# EAGLE board board3 (EAGLE 7.7.0)
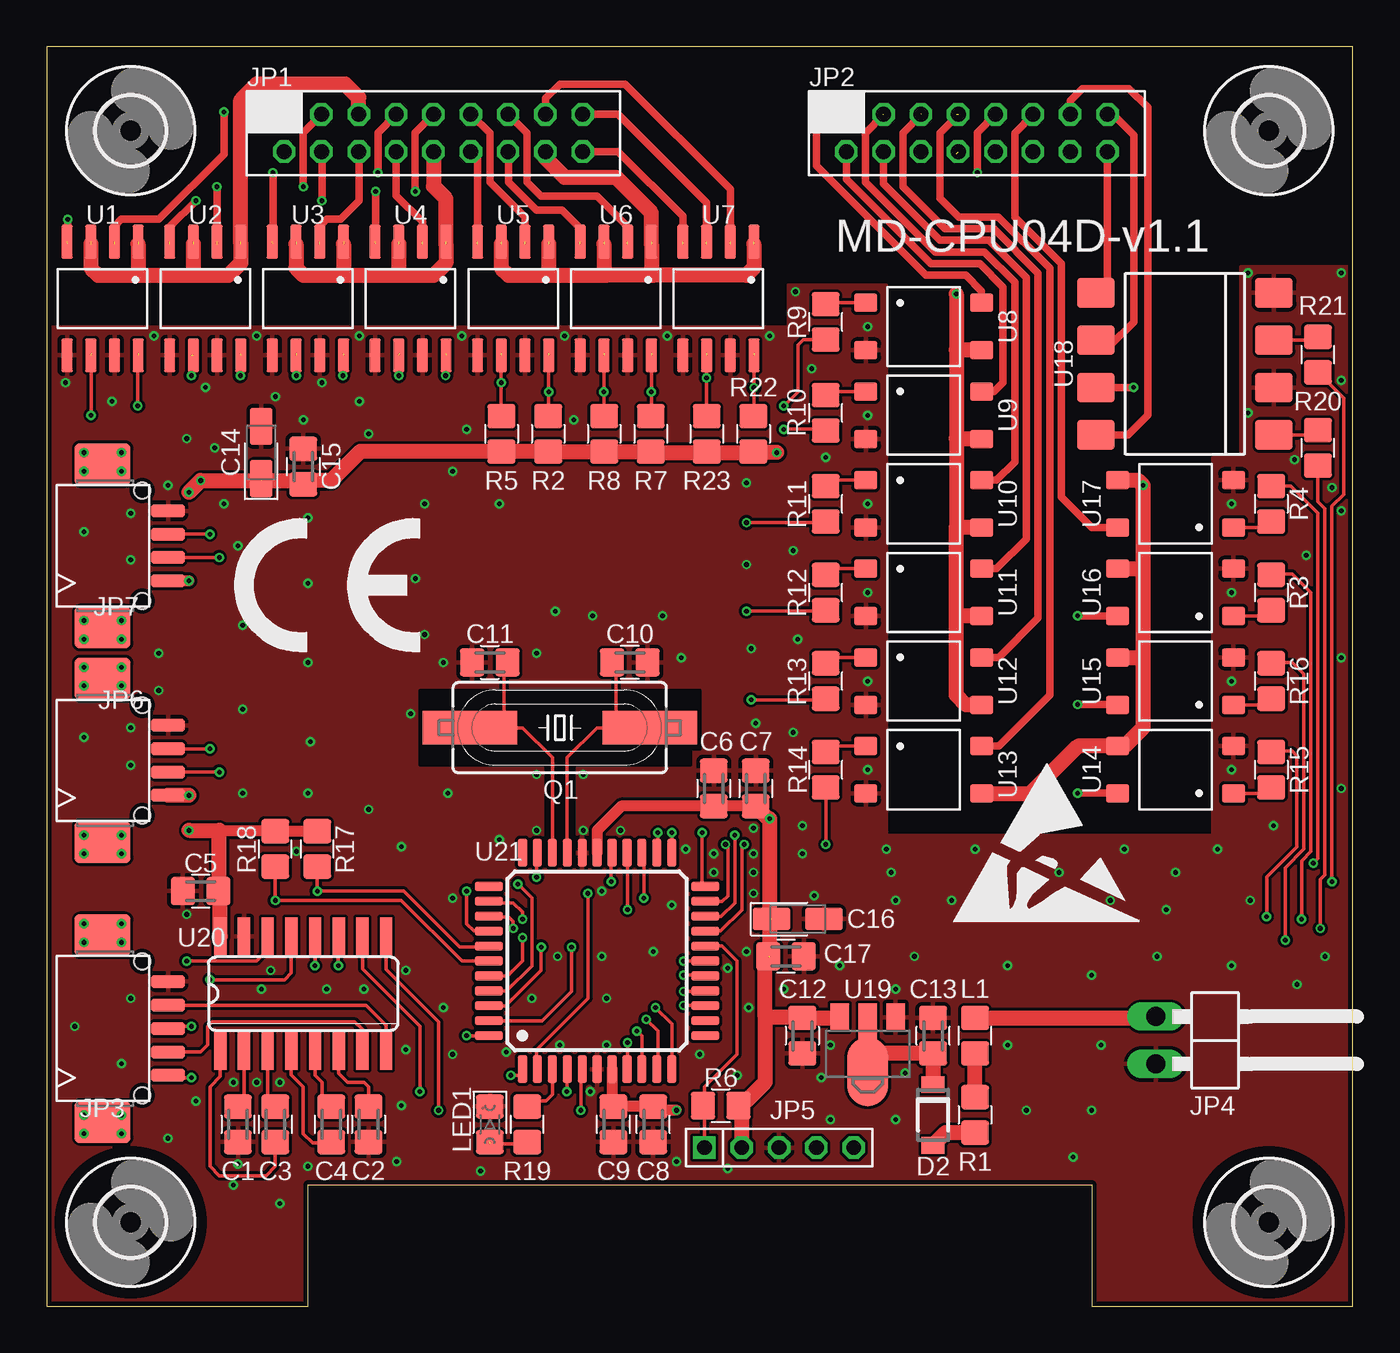
[diagram p0: board, top side]
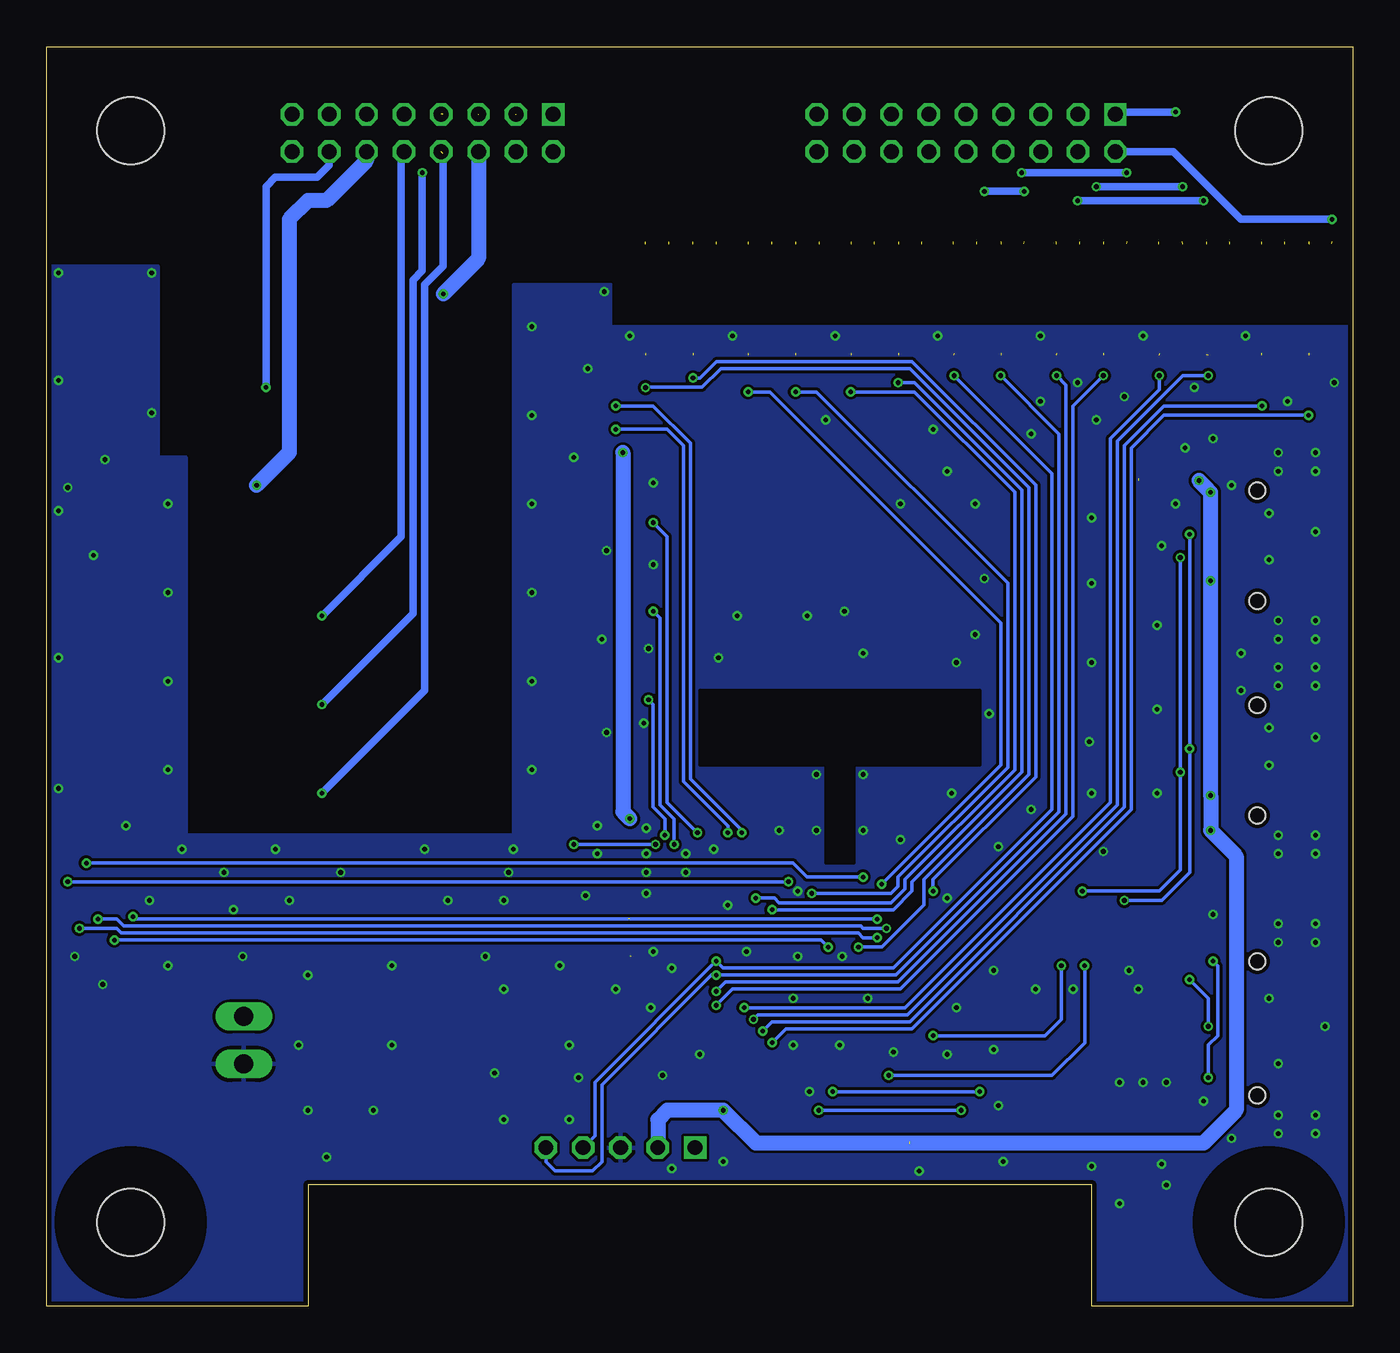
[diagram p1: board, bottom side, seen from below]

Size 70 x 67.5 mm. Coordinates in mm from the lower left corner, seen from the top.
Outline: 0,0 14,0 14,6.5 56,6.5 56,0 70,0 70,67.5 0,67.5 0,0
Copper layers (1*16): Top 0.018mm / dielectric 1.55mm / Bottom 0.018mm
Design rules "eC_2Layer_PClass6_BaseCopperO18_eCDefault *": minimum track width 0.15mm, minimum drill 0.25mm, track to track 0.15mm, track to pad 0.15mm, pad to pad 0.15mm, via to via 0.15mm, smd to smd 0mil, copper to edge 0.25mm, drill to drill 0.35mm, minimum pad ring 0.175mm, minimum via ring 0.125mm, stop-mask expansion 0mil, vias tented up to drill 0.45mm, thermal gap 0.2mm
Net classes: 0 default: width 0.2 mm; 1 V24: width 0.4 mm; 2 VCC: width 0.8 mm; 3 GND: width 0.8 mm; 4 COMI: width 0.8 mm; 5 COMO: width 0.8 mm; 6 INP: width 0.4 mm; 7 OUT: width 0.4 mm
tRestrict: 10 lines
bRestrict: 8 lines

## Footprints (pad centres in the part's own frame; a part is rotated, then mirrored left to right if it is on the bottom)
C-0805 = smd 1.3 x 1.5: 1 -0.95,0; 2 0.95,0
C-SMC-A = smd 2 x 1.2: 1 -1.4,0; 2 1.4,0
SOD123FL = smd 0.91 x 1.22: A 1.625,0; C -1.625,0
DF11-18DP-2DSA = drill 0.8 square: 1 -8.02,1 | drill 0.8 octagon: 2 -8.02,-1; 3 -6.02,1; 4 -6.02,-1; 5 -4.02,1; 6 -4.02,-1; 7 -2.02,1; 8 -2.02,-1; 9 -0.02,1; 10 -0.02,-1; 11 1.98,1; 12 1.98,-1; 13 3.98,1; 14 3.98,-1; 15 5.98,1; 16 5.98,-1; 17 7.98,1; 18 7.98,-1
DF11-16DP-2DSA = drill 0.8 square: 1 -7.02,1 | drill 0.8 octagon: 2 -7.02,-1; 3 -5.02,1; 4 -5.02,-1; 5 -3.02,1; 6 -3.02,-1; 7 -1.02,1; 8 -1.02,-1; 9 0.98,1; 10 0.98,-1; 11 2.98,1; 12 2.98,-1; 13 4.98,1; 14 4.98,-1; 15 6.98,1; 16 6.98,-1
1X5-SMD-90-E = smd 0.7 x 1.8: 1 -2.5,-3.5; 2 -1.25,-3.5; 3 0,-3.5; 4 1.25,-3.5; 5 2.52,-3.5 | smd 2.25 x 3: S1 -5,0; S2 5,0 | hole 0.85: -3.58,-2.125; 3.6,-2.125
1X02/90 = drill 1.016 long: 1 -1.27,-3.81; 2 1.27,-3.81
1X05-2MM = drill 0.8 square: 1 -4,0 | drill 0.8 octagon: 2 -2,0; 3 0,0; 4 2,0; 5 4,0
1X4-SMD-90-E = smd 0.7 x 1.8: 1 -1.875,-3.5; 2 -0.625,-3.5; 3 0.625,-3.5; 4 1.875,-3.5 | smd 2.25 x 3: S1 -4.375,0; S2 4.375,0 | hole 0.85: -2.955,-2.125; 2.955,-2.125
L-0805 = smd 1.3 x 1.5: 1 -0.95,0; 2 0.95,0
D-LED-0805 = smd 1.3 x 1.5: A 0.95,0; C -0.95,0
SM49 = smd 5.08 x 1.778: 1 -4.826,0; 2 4.826,0
R-0805 = smd 1.3 x 1.5: 1 -0.95,0; 2 0.95,0
SO08 = smd 0.6 x 1.8: 1 -1.905,-3.042; 2 -0.635,-3.042; 3 0.635,-3.042; 4 1.905,-3.042; 5 1.905,3.042; 6 0.635,3.042; 7 -0.635,3.042; 8 -1.905,3.042
SOP04 = smd 1 x 1.25: 1 -1.27,-3.1; 2 1.27,-3.1; 3 1.27,3.1; 4 -1.27,3.1
DIL8-SMD = smd 1.6 x 2: 1 -3.81,-4.77; 2 -1.27,-4.77; 3 1.27,-4.77; 4 3.81,-4.77; 5 3.81,4.77; 6 1.27,4.77; 7 -1.27,4.77; 8 -3.81,4.77
SOT89 = smd 1 x 1.5: 1 -1.499,-1.981; 3 1.499,-1.981 | smd 1 x 2: 2 0,-1.727 | smd 2.2 x 3.7: 2@1 0,0.94
SO16 = smd 0.66 x 2.032: 1 -4.445,-3.073; 2 -3.175,-3.073; 3 -1.905,-3.073; 4 -0.635,-3.073; 5 0.635,-3.073; 6 1.905,-3.073; 7 3.175,-3.073; 8 4.445,-3.073; 9 4.445,3.073; 10 3.175,3.073; 11 1.905,3.073; 12 0.635,3.073; 13 -0.635,3.073; 14 -1.905,3.073; 15 -3.175,3.073; 16 -4.445,3.073
TQFP44 = smd 1.5 x 0.5: 1 -5.8,4; 2 -5.8,3.2; 3 -5.8,2.4; 4 -5.8,1.6; 5 -5.8,0.8; 6 -5.8,0; 7 -5.8,-0.8; 8 -5.8,-1.6; 9 -5.8,-2.4; 10 -5.8,-3.2; 11 -5.8,-4; 23 5.8,-4; 24 5.8,-3.2; 25 5.8,-2.4; 26 5.8,-1.6; 27 5.8,-0.8; 28 5.8,0; 29 5.8,0.8; 30 5.8,1.6; 31 5.8,2.4; 32 5.8,3.2; 33 5.8,4 | smd 0.5 x 1.5: 12 -4,-5.8; 13 -3.2,-5.8; 14 -2.4,-5.8; 15 -1.6,-5.8; 16 -0.8,-5.8; 17 0,-5.8; 18 0.8,-5.8; 19 1.6,-5.8; 20 2.4,-5.8; 21 3.2,-5.8; 22 4,-5.8; 34 4,5.8; 35 3.2,5.8; 36 2.4,5.8; 37 1.6,5.8; 38 0.8,5.8; 39 0,5.8; 40 -0.8,5.8; 41 -1.6,5.8; 42 -2.4,5.8; 43 -3.2,5.8; 44 -4,5.8
3,6 = hole 3.6: 0,0

## Placement (x,y rotation side)
C1  100n  [C-0805]  10.25,9.75 270 top
C2  100n  [C-0805]  17.25,9.75 270 top
C3  100n  [C-0805]  12.25,9.75 270 top
C4  100n  [C-0805]  15.25,9.75 270 top
C5  100n  [C-0805]  8.25,22.25 0 top
C6  10n  [C-0805]  35.75,27.75 270 top
C7  100n  [C-0805]  38,27.75 270 top
C8  10n  [C-0805]  32.5,9.75 90 top
C9  100n  [C-0805]  30.38,9.75 90 top
C10  22p  [C-0805]  31.25,34.5 180 top
C11  22p  [C-0805]  23.75,34.5 0 top
C12  4u7  [C-0805]  40.5,14.5 270 top
C13  4u7  [C-0805]  47.5,14.5 90 top
C14  10u  [C-SMC-A]  11.5,45.75 90 top
C15  100n  [C-0805]  13.75,45 270 top
C16  10u  [C-SMC-A]  40.25,20.75 0 top
C17  100n  [C-0805]  39.62,18.75 180 top
D2  MBR0540  [SOD123FL]  47.5,10.25 270 top
JP1  DF11-18DP-2DSA  [DF11-18DP-2DSA]  20.75,62.88 0 top
JP2  DF11-16DP-2DSA  [DF11-16DP-2DSA]  49.88,62.88 0 top
JP3  DF13-1X5-SMD-90-E  [1X5-SMD-90-E]  3,14.88 90 top
JP4  [1X02/90]  63.25,14.25 270 top
JP5  ICSP  [1X05-2MM]  39.25,8.5 0 top
JP6  DF13-1X4-SMD-90-E  [1X4-SMD-90-E]  3,29.25 90 top
JP7  DF13-1X4-SMD-90-E  [1X4-SMD-90-E]  3,40.75 90 top
L1  600R  [L-0805]  49.75,14.5 90 top
LED1  GREEN  [D-LED-0805]  23.75,9.75 270 top
Q1  16MHz  [SM49]  27.5,31 180 top
R1  5R1  [R-0805]  49.75,10.25 270 top
R2  10K  [R-0805]  26.88,46.75 270 top
R3  270  [R-0805]  65.62,38.25 270 top
R4  270  [R-0805]  65.62,43 270 top
R5  10K  [R-0805]  24.38,46.75 270 top
R6  10K  [R-0805]  36.12,10.75 0 top
R7  10K  [R-0805]  32.38,46.75 270 top
R8  10K  [R-0805]  29.88,46.75 270 top
R9  270  [R-0805]  41.75,52.75 90 top
R10  270  [R-0805]  41.75,47.88 90 top
R11  270  [R-0805]  41.75,43 90 top
R12  270  [R-0805]  41.75,38.25 90 top
R13  270  [R-0805]  41.75,33.5 90 top
R14  270  [R-0805]  41.75,28.75 90 top
R15  270  [R-0805]  65.62,28.75 270 top
R16  270  [R-0805]  65.62,33.5 270 top
R17  1K5  [R-0805]  14.5,24.5 90 top
R18  1K5  [R-0805]  12.25,24.5 90 top
R19  270  [R-0805]  25.75,9.75 90 top
R20  270  [R-0805]  68.12,46 90 top
R21  270  [R-0805]  68.12,51 90 top
R22  10K  [R-0805]  37.88,46.75 270 top
R23  10K  [R-0805]  35.38,46.75 270 top
U1  ACPL224  [SO08]  3,54 180 top
U2  ACPL224  [SO08]  8.5,54 180 top
U3  ACPL224  [SO08]  14,54 180 top
U4  ACPL224  [SO08]  19.5,54 180 top
U5  ACPL224  [SO08]  25,54 180 top
U6  ACPL224  [SO08]  30.5,54 180 top
U7  ACPL224  [SO08]  36,54 180 top
U8  VO1400  [SOP04]  47,52.5 270 top
U9  VO1400  [SOP04]  47,47.75 270 top
U10  VO1400  [SOP04]  47,43 270 top
U11  VO1400  [SOP04]  47,38.25 270 top
U12  VO1400  [SOP04]  47,33.5 270 top
U13  VO1400  [SOP04]  47,28.75 270 top
U14  VO1400  [SOP04]  60.5,28.75 90 top
U15  VO1400  [SOP04]  60.5,33.5 90 top
U16  VO1400  [SOP04]  60.5,38.25 90 top
U17  VO1400  [SOP04]  60.5,43 90 top
U18  LH1522AAC  [DIL8-SMD]  61,50.5 90 top
U19  MCP1703T-3302E/MB  [SOT89]  44,13.5 180 top
U20  MAX3232CSE  [SO16]  13.75,16.75 0 top
U21  PIC18F46K22-I/PT  [TQFP44]  29.5,18.5 90 top
U$1  [CE_7.3MM]  10,35 0 top
U$2  [ESD_10.00]  48.5,20.5 0 top
U$3  [3,6]  65.5,4.5 0 top
U$6  [3,6]  65.5,63 0 top
U$9  [3,6]  4.5,63 0 top
U$10  [3,6]  4.5,4.5 0 top

## Library data of the parts
C1-C5 C7 C9 C15 C17 = smd-parts; C_CAPACITANCE: 100nF; C_CASE: 0805; C_DIELECTRIC: X7R; C_VOLTAGE: 25V; MANUFACTURER: Kemet; REFERENCE: C0805C104K5RACTU; TYPE: C
C6 C8 = smd-parts; C_CAPACITANCE: 10nF; C_CASE: 0805; C_DIELECTRIC: X7R; C_VOLTAGE: 25V; MANUFACTURER: Kemet; REFERENCE: C0805C103K5RACTU; TYPE: C
C10 C11 = smd-parts; C_CAPACITANCE: 22pF; C_CASE: 0805; C_DIELECTRIC: X7R; C_VOLTAGE: 25V; MANUFACTURER: AVX; REFERENCE: 08051C220JAT2A; TYPE: C
C12 C13 = smd-parts; C_CAPACITANCE: 4.7uF; C_CASE: 0805; C_DIELECTRIC: X7R; C_VOLTAGE: 25V; MANUFACTURER: Taiyo Yuden; REFERENCE: TMK212AB7475KG-T; TYPE: C
C14 = smd-parts; C_CAPACITANCE: 10uF; C_CASE: A; C_DIELECTRIC: TANT; C_VOLTAGE: 6.3V; MANUFACTURER: AVX; REFERENCE: TPSA106K006R1500; TYPE: C
C16 = smd-parts; C_CAPACITANCE: 10uF; C_CASE: A; C_DIELECTRIC: TANT; C_VOLTAGE: 6.3V; MANUFACTURER: TPSA106K006R1500; REFERENCE: TPSA106K006R1500; TYPE: C
D2 = diode; D_CASE: SOD123FL; MANUFACTURER: Fairchild Semiconductor; REFERENCE: MBR0540; TYPE: D
JP1 = hirose-df11; MANUFACTURER: Hirose Electric; REFERENCE: DF11-18DP-2DSA(08)
JP2 = hirose-df11; MANUFACTURER: Hirose Electric; REFERENCE: DF11-16DP-2DSA(08)
JP3 = hirose-df13; MANUFACTURER: Hirose Electric; REFERENCE: DF13-5P-1.25H(20)
JP4 = pinhead; MANUFACTURER: Molex; REFERENCE: 22-27-2021
JP5 = pinhead200
JP6 JP7 = hirose-df13; MANUFACTURER: Hirose Electric; REFERENCE: DF13-4P-1.25H(20)
L1 = smd-parts; L_CASE: 0805; L_IMPEDANCE: 600R; MANUFACTURER: Vishay; REFERENCE: ILBB0805ER601V; TYPE: L
LED1 = smd-parts; LED_CASE: 0805; MANUFACTURER: Broadcom Limited; REFERENCE: HSMG-C170; TYPE: LED
Q1 = crystal; MANUFACTURER: TXC Corporation; OC_FARNELL: unknown; OC_NEWARK: unknown; REFERENCE: 9C-16.000MEEJ-T; TYPE: XTAL; XTAL_CASE: HC-49/S; XTAL_FREQUENCY: 16MHz
R1 = smd-parts; MANUFACTURER: Vishay; REFERENCE: CRCW08055R10FNEA; R_CASE: 0805; R_RESISTANCE: 5R1; R_TOLERANCE: 1%; TYPE: R
R2 R5-R8 R22 R23 = smd-parts; MANUFACTURER: Vishay; REFERENCE: CRCW080510K0FKEB; R_CASE: 0805; R_RESISTANCE: 10K; R_TOLERANCE: 1%; TYPE: R
R3 R4 R9-R16 R19-R21 = smd-parts; MANUFACTURER: Vishay; REFERENCE: CRCW0805270RFKEA; R_CASE: 0805; R_RESISTANCE: 270R; R_TOLERANCE: 1%; TYPE: R
R17 R18 = smd-parts; MANUFACTURER: Vishay; REFERENCE: CRCW08051K50FKEA; R_CASE: 0805; R_RESISTANCE: 1K5; R_TOLERANCE: 1%; TYPE: R
U1-U5 = optoacopladores; MANUFACTURER: Broadcom Limited; REFERENCE: ACPL-224-500E; TYPE: IC
U6 U7 = optoacopladores; MANUFACTURER: Broadcom Limited; REFERENCE: ACPL-224-500E
U8-U17 = optoacopladores; MANUFACTURER: Vishay; REFERENCE: VO1400AEFTR
U18 = optoacopladores; MANUFACTURER: Vishay; REFERENCE: LH1522AAC
U19 = microchip-analog; IC_CASE: SOT89; MANUFACTURER: Microchip; REFERENCE: MCP1703T-3302E/MB; TYPE: IC
U20 = maxim; MANUFACTURER: Maxim; MPN: MAX3232CSE; OC_FARNELL: 9725490; OC_NEWARK: 90C2890; REFERENCE: MAX3232ECDR; TYPE: IC
U21 = microchip-pic; MANUFACTURER: Microchip; REFERENCE: PIC18F46K22T-I/PT; TYPE: IC
U$1 U$2 = logo
U$3 U$6 U$9 U$10 = holes

## Nets
GND [GND]: C1.2 C2.2 C5.1 C6.1 C7.1 C8.1 C9.1 C10.1 C11.1 C12.2 C13.2 C14.2 C15.1 C16.2 C17.1 JP3.5 JP4.2 JP5.3 JP6.4 JP7.4 LED1.C U1.5 U1.7 U2.5 U2.7 U3.5 U3.7 U4.5 U4.7 U5.5 U5.7 U6.5 U6.7 U7.5 U7.7 U8.2 U9.2 U10.2 U11.2 U12.2 U13.2 U14.2 U15.2 U16.2 U17.2 U18.2 U18.4 U19.1 U20.15 U21.6 U21.29
I0 [INP]: JP1.1 U1.2
I1 [INP]: JP1.2 U1.4
I2 [INP]: JP1.3 U2.2
I3 [INP]: JP1.4 U2.4
I4 [INP]: JP1.6 U3.2
I5 [INP]: JP1.7 U3.4
I6 [INP]: JP1.8 U4.2
I7 [INP]: JP1.9 U4.4
I8 [INP]: JP1.11 U5.2
I9 [INP]: JP1.12 U5.4
I10 [INP]: JP1.13 U6.2
I11 [INP]: JP1.14 U6.4
I12 [INP]: JP1.15 U7.2
I13A [INP]: JP1.17 U7.3
I13B [INP]: JP1.18 U7.4
IC0 [COMI]: JP1.5 U1.1 U1.3 U2.1 U2.3
IC1 [COMI]: JP1.10 U3.1 U3.3 U4.1 U4.3
IC2 [COMI]: JP1.16 U5.1 U5.3 U6.1 U6.3 U7.1
IN0: U1.8 U21.9
IN1: U1.6 U21.8
IN2: U2.8 U21.11
IN3: U2.6 U21.10
IN4: U3.8 U21.15
IN5: U3.6 U21.14
IN6/PGD: JP5.4 U4.8 U21.17
IN7/PGC: JP5.5 U4.6 U21.16
IN8: R2.1 U5.8 U21.25
IN9: R5.1 U5.6 U21.26
IN10: R7.1 U6.8 U21.41
IN11: R8.1 U6.6 U21.2
IN12: R22.1 U7.8 U21.42
IN13: R23.1 U7.6 U21.37
LED: R19.2 U21.3
N$1: R3.2 U16.1
N$2 [VCC]: JP4.1 L1.2
N$3 [VCC]: L1.1 R1.1
N$4: JP3.1 U20.14
N$5 [VCC]: C13.1 D2.C U19.2 U19.2@1
N$6: R4.2 U17.1
N$7 [VCC]: D2.A R1.2
N$8: C10.2 Q1.1 U21.30
N$9: R20.2 U18.1
N$13: JP3.2 U20.7
N$14: JP3.3 U20.13
N$15: JP3.4 U20.8
N$16: C3.2 U20.1
N$17: R9.2 U8.1
N$18: R10.2 U9.1
N$22: LED1.A R19.1
N$25: R11.2 U10.1
N$26: R12.2 U11.1
N$29: C3.1 U20.3
N$30: C4.2 U20.4
N$33: C4.1 U20.5
N$34: C1.1 U20.2
N$35: C2.1 U20.6
N$36: C11.2 Q1.2 U21.31
N$48: R21.2 U18.3
N$51: R15.2 U14.1
N$52: R13.2 U12.1
N$53: R14.2 U13.1
N$54: R16.2 U15.1
O0 [OUT]: JP2.1 U8.4
O1 [OUT]: JP2.2 U9.4
O2 [OUT]: JP2.3 U10.4
O3 [OUT]: JP2.4 U11.4
O4 [OUT]: JP2.5 U12.4
O5 [OUT]: JP2.7 U13.4
O6 [OUT]: JP2.8 U14.4
O7 [OUT]: JP2.9 U15.4
O8 [OUT]: JP2.10 U16.4
O9 [OUT]: JP2.11 U17.4
O10A [OUT]: JP2.13 U18.8
O10B [OUT]: JP2.14 U18.7
O11A [OUT]: JP2.15 U18.6
O11B [OUT]: JP2.16 U18.5
OC0 [COMO]: JP2.6 U8.3 U9.3 U10.3 U11.3 U12.3
OC1 [COMO]: JP2.12 U13.3 U14.3 U15.3 U16.3 U17.3
OUT0: R9.1 U21.24
OUT1: R10.1 U21.23
OUT2: R11.1 U21.22
OUT3: R12.1 U21.21
OUT4: R13.1 U21.20
OUT5: R14.1 U21.19
OUT6: R15.1 U21.35
OUT7: R16.1 U21.43
OUT8: R3.1 U21.36
OUT9: R4.1 U21.32
OUT10: R20.1 U21.40
OUT11: R21.1 U21.27
RX1: U20.12 U21.1
RX2: U20.9 U21.5
SCL2: JP6.2 JP7.2 R17.1 U21.38
SDA2: JP6.3 JP7.3 R18.1 U21.39
TX1: U20.11 U21.44
TX2: U20.10 U21.4
VCC [VCC]: C5.2 C6.2 C7.2 C8.2 C9.2 C12.1 C14.1 C15.2 C16.1 C17.2 JP5.2 JP6.1 JP7.1 R2.2 R5.2 R6.2 R7.2 R8.2 R17.2 R18.2 R22.2 R23.2 U19.3 U20.16 U21.7 U21.28
VPP: JP5.1 R6.1 U21.18

## Tracks (layer width: path | path; a pad name or v marks a point on that pad's centre or on a via)
GND  (via drill 0.25)
  other vias: 2,45.75 4,45.75 4,44.75 2,44.75 2,36.75 2,35.75 4,35.75 4,36.75 2,34.25 4,34.25 4,33.25 2,33.25 2,25.25 4,25.25 4,24.25 2,24.25 2,20.5 4,20.5 4,19.5 2,19.5 2,10.25 2,9.25 4,9.25 4,10.25 17.25,26.62 33.75,7.75 44,38.25 44,33.5 41.5,12.25 46,12.5 51.5,14 52.5,10.5 55,8 56,10.5 56.5,14 20.25,36 14,27.5 17.25,46.75 28.25,47.5 20.25,43 19.5,31.75 14,34.5 14,38.75 14,42.25 3.5,48.5 9.5,43 10.25,40.75 4.5,42.5 6.5,44 4.5,31 6,33 4.5,29 4.5,40 6,35 10.5,27.5 10.5,32 10.5,36.5 14,7.5 18.75,7.75 19,10.75 12.5,12 10,12 19,24.62 26.25,35 21.75,44.75 27.25,37.25 22.5,47 14.12,30.25 7.5,46.5 40.12,54.38 45.5,17 21.25,34.5 11.25,12 10.25,7.62 29.12,11.5 65.75,25.75 62.75,24.5 57.75,24.5 54.25,23.25 49.75,24.5 45,24.5 45.5,21.75 48.5,21.75 41.12,22 42.5,18.25 46.5,18.75 51.5,18.25 56,17.75 59.5,18.75 63.5,18.25 67,17.25 68.5,18.75 64.5,21.75 60,21.25 57,21.75 63.5,28.75 63.5,33.5 63.5,38.25 63.5,43 69.38,55.38 64.38,55.38 64.38,47.88 69.38,42.62 67.5,40.25 69.38,34.75 69.38,27.75 45.5,10 42,10 42,14 35,13.5 33.5,21.5 32.5,19 29.75,18.75 30,16.5 21.75,13.5 21.25,16 19.25,18 17,17 19.25,13.75 11.5,17 12,18 8,11 6.5,9 10,6.5 12.5,5.5 23.25,7.25 33,37 34,34.75 29.25,37 24.25,43 19.75,39 37.5,44.12 41,50.25 21.5,27.5 26.25,28.5 24.25,25 28.75,25.5 28.75,28.5 30.75,25.5 34.25,24.5 35.75,23.25 37.88,22.12 37.5,19 37,12.38 36.5,7.38 15,17 13.38,24.38 7.5,21 40.5,25.75 40,30.75 40.25,35.75 40,40.5 37.5,39.75 37.75,35.25 38,31.25 38.75,52 44,52.5 44,47.75 44,43 41.75,45.5 44,28.75 40.5,24.25 27.38,18.75 39.5,17 68.88,43.88 66.88,45.38 69.38,49.62 36.5,18.12 37.62,16 45.25,23.25 60.5,23.25 29.75,22.25 30,14 27.5,14 24.62,13.62 26.25,25.5 21.75,21.88 4.5,16.5 4,13 1.5,15 2,30.5 2,41.5 1,49.5 8.5,49.25 5.75,52 11.25,52 16.75,52 22.25,52 27.75,52 33.25,52 16.75,48.5 14.75,49.5 13.75,47.5 12.25,48.75 9,46 26,16.5 37.88,25.62 35.75,24.25 37.88,23.25 37.88,24.25
  pour Top: 0.25,52.5 39.75,52.5 39.75,54.75 45,54.75 45,25.25 62.5,25.25 62.5,45.5 64,45.5 64,55.75 69.75,55.75 69.75,0.25 56.25,0.25 56.25,6.75 13.75,6.75 13.75,0.25 0.25,0.25
  pour Bottom: 0.25,52.5 39.75,52.5 39.75,54.75 45,54.75 45,25.25 62.5,25.25 62.5,45.5 64,45.5 64,55.75 69.75,55.75 69.75,0.25 56.25,0.25 56.25,6.75 13.75,6.75 13.75,0.25 0.25,0.25
I0  (via drill 0.25)  (1 unrouted)
  Top 0.4: 3.63,56.92 3.63,57.88 4,58.25 6,58.25 9.5,61.75 v9.5,64
  Bottom 0.4: v9.5,64 12.61,64 JP1.1
I1  (via drill 0.25)  (1 unrouted)
  Top 0.4: v1.12,58.25 1.12,56.95 1.09,56.92
  Bottom 0.4: JP1.2 9.62,61.88 6,58.25 v1.12,58.25
I2  (via drill 0.25)  (1 unrouted)
  Top 0.4: v13.75,60 13.75,62.9 JP1.3 | v9.12,60 9.12,56.93 9.13,56.92
  Bottom 0.4: v9.12,60 v13.75,60
I3  (via drill 0.25)  (1 unrouted)
  Top 0.4: 6.59,56.92 6.59,57.84 v8,59.25 | v14.75,59.25 14.75,61.85 JP1.4
  Bottom 0.4: v8,59.25 v14.75,59.25
I4  (1 unrouted)
  Top 0.4: JP1.6 16.75,61.85 16.75,59.25 15.75,58.25 15,58.25 14.63,57.88 14.63,56.92
I5  (via drill 0.25)  (1 unrouted)
  Top 0.4: v17.75,60.75 17.75,62.9 JP1.7 | v12.12,60.75 12.12,56.95 12.1,56.92
  Bottom 0.4: v12.12,60.75 v17.75,60.75
I6  (1 unrouted)
  Top 0.4: JP1.8 18.73,59.52 20.14,58.12 20.14,56.92
I7  (via drill 0.25)  (1 unrouted)
  Top 0.4: v19.75,59.75 19.75,62.9 JP1.9 | v17.62,59.75 17.62,56.95 17.59,56.92
  Bottom 0.4: v17.62,59.75 v19.75,59.75
I8  (1 unrouted)
  Top 0.4: 25.64,56.92 25.64,58.37 23.75,60.25 23.75,62.85 JP1.11
I9  (1 unrouted)
  Top 0.4: 23.09,56.92 23.09,61.51 JP1.12
I10  (1 unrouted)
  Top 0.4: 31.14,56.92 31.14,57.87 29.5,59.5 26.5,59.5 25.75,60.25 25.75,62.85 JP1.13
I11  (1 unrouted)
  Top 0.4: 28.59,56.92 28.59,57.78 27.62,58.75 26.25,58.75 24.75,60.25 24.75,61.85 JP1.14
I12  (1 unrouted)
  Top 0.4: 36.63,56.92 36.63,59.87 31,65.5 27.5,65.5 26.73,64.73 JP1.15
I13A  (1 unrouted)
  Top 0.4: 35.37,56.92 35.37,59.13 30.62,63.88 JP1.17
I13B  (1 unrouted)
  Top 0.4: JP1.18 30.62,61.88 34.09,58.41 34.09,56.92
IC0  (4 unrouted)
  Top 0.8: 2.37,56.92 2.37,55.63 2.75,55.25 4.75,55.25 | 4.75,55.25 8,55.25 | 8,55.25 9.75,55.25 10.4,55.91 10.4,56.92 10.4,64.66 10.5,64.75 10.62,64.88 11.25,65.5 16,65.5 16.73,64.77 JP1.5 | 4.91,56.92 4.91,55.41 4.75,55.25 | 7.87,56.92 7.87,55.38 8,55.25
IC1  (4 unrouted)
  Top 0.8: 13.37,56.92 13.37,55.63 13.75,55.25 15.75,55.25 | 15.75,55.25 19,55.25 | 19,55.25 20.75,55.25 21.41,55.91 21.41,56.92 21.41,59.34 20.73,60.02 JP1.10 | 15.9,56.92 15.9,55.41 15.75,55.25 | 18.86,56.92 18.86,55.38 19,55.25
IC2  (5 unrouted)
  Top 0.8: 24.36,56.92 24.36,55.63 24.75,55.25 27,55.25 | 27,55.25 30,55.25 | 26.91,56.92 26.91,55.34 27,55.25 | 29.86,56.92 29.86,55.38 30,55.25 | 37.91,56.92 37.91,55.66 37.5,55.25 32.5,55.25 | 32.5,55.25 30,55.25 | 32.5,55.25 32.41,55.34 32.41,56.92 32.41,58.59 30.5,60.5 27.75,60.5 26.73,61.52 JP1.16
IN0  (via drill 0.25)  (1 unrouted)
  Top 0.2: U21.9 31.9,14.47 v31.62,14.75 | 4.91,51.08 4.91,50.41 4.88,50.38 v4.88,48.25
  Bottom 0.2: v31.62,14.75 31.12,15.25 23.75,15.25 12.25,26.75 12.25,46.12 10.12,48.25 v4.88,48.25
IN1  (via drill 0.25)  (1 unrouted)
  Top 0.2: U21.8 31.12,12.8 v31.12,14.12 | v2.38,47.75 2.38,51.07 2.37,51.08
  Bottom 0.2: v31.12,14.12 30.38,14.88 23.62,14.88 11.88,26.62 11.88,46 10.12,47.75 v2.38,47.75
IN2  (via drill 0.25)  (1 unrouted)
  Top 0.2: U21.11 33.5,15.12 v32.62,16 | v10.38,49.88 10.38,51.05 10.4,51.08
  Bottom 0.2: v32.62,16 24,16 13,27 13,46.5 10.38,49.12 v10.38,49.88
IN3  (via drill 0.25)  (1 unrouted)
  Top 0.2: U21.10 32.75,12.75 32.75,14.75 v32.12,15.38 32.2,15.3 | v7.75,49.88 7.75,50.97 7.87,51.08
  Bottom 0.2: v32.12,15.38 31.88,15.62 23.88,15.62 12.62,26.88 12.62,46.38 9.12,49.88 v7.75,49.88
IN4  (via drill 0.25)  (1 unrouted)
  Top 0.2: v34.12,16.88 35.27,16.88 U21.15 | v15.88,49.88 15.88,51.05 15.9,51.08
  Bottom 0.2: v15.88,49.88 15.38,49.38 15.38,26.38 24.38,17.38 33.62,17.38 v34.12,16.88
IN5  (via drill 0.25)  (1 unrouted)
  Top 0.2: v34.12,16.12 35.27,16.12 U21.14 | v13.38,49.88 13.38,51.07 13.37,51.08
  Bottom 0.2: v34.12,16.12 33.25,17 24.25,17 15,26.25 15,48.25 v13.38,49.88
IN6/PGD  (via drill 0.25)  (1 unrouted)
  Top 0.2: U21.17 v34.12,18.5 | v21.38,49.88 21.38,51.05 21.41,51.08
  Bottom 0.2: JP5.4 40.62,9.12 40.62,12 v34.12,18.5 33.75,18.12 24.62,18.12 16.12,26.62 16.12,44.62 v21.38,49.88
IN7/PGC  (via drill 0.25)  (1 unrouted)
  Top 0.2: v34.12,17.75 35.25,17.75 U21.16 35.35,17.75 | v18.88,49.88 18.88,51.07 18.86,51.08
  Bottom 0.2: JP5.5 43.25,7.75 42.75,7.25 40.75,7.25 40.25,7.75 40.25,11.88 34.38,17.75 v34.12,17.75 24.5,17.75 15.75,26.5 15.75,46.75 v18.88,49.88
IN8  (via drill 0.25)  (1 unrouted)
  Top 0.2: U21.25 31.9,23.9 32,23.62 v32,21.88 | 26.91,51.08 v26.91,49 26.91,47.73 R2.1
  Bottom 0.2: v32,21.88 31,21.88 30.75,21.62 24.75,21.62 24,22.38 24,22.88 18.12,28.75 18.12,43.62 23.5,49 v26.91,49
IN9  (via drill 0.25)  (1 unrouted)
  Top 0.2: 24.36,51.08 v24.36,49.5 24.36,47.71 R5.1 | v31.12,21.25 31.12,24.2 U21.26
  Bottom 0.2: v31.12,21.25 24.62,21.25 23.62,22.25 23.62,22.75 17.75,28.62 17.75,43.75 23.5,49.5 v24.36,49.5
IN10  (via drill 0.25)  (1 unrouted)
  Top 0.2: 32.41,51.08 v32.41,49 32.41,47.73 R7.1 | U21.41 24.65,16.9 26,18.25 26,21.88 v25.25,22.62
  Bottom 0.2: v32.41,49 31.25,49 18.88,36.62 18.88,29 v25.25,22.62
IN11  (via drill 0.25)  (1 unrouted)
  Top 0.2: U21.2 26.3,13.2 26.25,13.25 26.25,13.75 29,16.5 v29,22.12 | 29.86,51.08 v29.86,49 29.86,47.71 R8.1
  Bottom 0.2: v29,22.12 24.75,22.12 24.38,22.5 24.38,23 18.5,28.88 18.5,38.75 28.75,49 v29.86,49
IN12  (via drill 0.25)  (1 unrouted)
  Top 0.2: 37.91,51.08 v37.91,49.23 37.91,47.73 R22.1 | U21.42 24.6,16.1 26.5,18 v26.5,19.25
  Bottom 0.2: v37.91,49.23 37.88,49.25 34.88,49.25 33.88,50.25 23.75,50.25 17.38,43.88 17.38,28.5 23,22.88 23,21.5 25.25,19.25 v26.5,19.25
IN13  (via drill 0.25)  (1 unrouted)
  Top 0.2: 35.37,51.08 v35.37,49.75 35.37,47.71 R23.1 | U21.37 22.9,20.1 22.5,20.5 v22.5,22.25
  Bottom 0.2: v22.5,22.25 22.5,22.88 17,28.38 17,44 23.62,50.62 34.12,50.62 34.99,49.75 v35.37,49.75
LED
  Top 0.2: U21.3 27.1,11.35 26.75,11 26.05,11 R19.2
N$1
  Top 0.2: U16.1 65.43,36.98 R3.2
N$2
  Top 0.6: 59.37,15.45 JP4.1
  Top 0.8: L1.2 59.37,15.45
N$3
  Top 0.8: R1.1 L1.1
N$4  (via drill 0.25)
  Top 0.2: JP3.1 7.12,12.38 7.25,12.25 v7.75,12.25 | v7.5,18.5 11.25,18.5 11.85,19.09 U20.14
  Bottom 0.2: v7.75,12.25 7.75,14 7.25,14.5 7.25,18.25 v7.5,18.5
N$5
  Top 0.6: U19.2 44,13.75 | 44,13.75 U19.2@1 | 44.2,13.55 44,13.75
  Top 0.8: 44.2,13.55 C13.1 D2.C
N$6
  Top 0.2: U17.1 65.43,41.73 R4.2
N$7
  Top 0.8: R1.2 48.17,9.3 D2.A
N$8
  Top 0.2: U21.30 27.9,29.4 29.5,31 30.75,31 | Q1.1 30.75,31 | 30.75,31 30.3,31.45 30.5,31.65 30.5,34 30.25,34 30.3,34.05 C10.2
N$9
  Top 0.2: U18.1 67.99,46.69 R20.2
N$13
  Top 0.2: JP3.2 8.25,13.62 8.62,14 8.62,15 8.88,15.25 16.5,15.25 16.93,14.82 U20.7
N$14  (via drill 0.25)
  Top 0.2: JP3.3 7.12,14.88 7.25,15 v7.75,15 | v8.75,17.5 12.75,17.5 13.12,17.86 U20.13
  Bottom 0.2: v7.75,15 7.75,16.5 v8.75,17.5
N$15
  Top 0.2: JP3.4 17.12,16.12 18.2,15.05 U20.8
N$16
  Top 0.2: U20.1 9.3,12.3 8.75,11.75 8.75,7.5 9.25,7 11.75,7 12.25,7.5 C3.2
N$17
  Top 0.2: U8.1 41.27,53.77 41.25,53.75 41.7,53.75 R9.2
N$18
  Top 0.2: U9.1 41.82,49.02 R10.2
N$22  (1 unrouted)
  Top 0.2: 23.75,8.7 25.65,8.7 R19.1
N$25
  Top 0.2: U10.1 42.07,44.27 R11.2
N$26
  Top 0.2: U11.1 42.07,39.52 R12.2
N$29
  Top 0.2: U20.3 11.85,11.11 C3.1
N$30
  Top 0.2: U20.4 13.12,12.38 13.75,11.75 13.75,9.25 14.25,8.75 15.2,8.75 C4.2
N$33
  Top 0.2: U20.5 14.38,12.37 14.75,12 14.75,10.25 14.8,10.25 C4.1
N$34
  Top 0.2: U20.2 10.57,11.03 C1.1
N$35
  Top 0.2: U20.6 15.65,12.47 16.12,12 17,12 17.25,11.75 C2.1
N$36
  Top 0.2: U21.31 27.1,29.4 25.5,31 24.5,31 | Q1.2 24.5,31 | 24.5,31 24.45,31.05 24.5,31.1 24.5,34 24.7,34.2 C11.2
N$48
  Top 0.2: U18.3 68.07,51.77 R21.2
N$51
  Top 0.2: U14.1 65.43,27.48 R15.2
N$52
  Top 0.2: U12.1 41.27,34.77 41.25,34.75 41.45,34.75 R13.2
N$53
  Top 0.2: U13.1 42.07,30.02 R14.2
N$54
  Top 0.2: U15.1 65.43,32.23 R16.2
O0
  Top 0.4: U8.4 50.1,54.4 49.25,55.25 47.12,55.25 41.25,61.12 41.25,63.25 41.88,63.88 JP2.1
O1
  Top 0.4: U9.4 50.77,49.02 51.25,49.5 51.25,54.62 50,55.88 47.38,55.88 42.85,60.4 JP2.2
O2  (1 unrouted)
  Top 0.4: 44.85,63.85 43.88,62.88 43.88,60.25 47.62,56.5 50.25,56.5 51.88,54.88 51.88,45.25 50.9,44.27 U10.4
O3
  Top 0.4: U11.4 50.9,39.52 52.5,41.12 52.5,55.12 50.5,57.12 47.88,57.12 44.85,60.15 JP2.4
O4  (1 unrouted)
  Top 0.4: U12.4 51.02,34.77 53.12,36.88 53.12,55.38 50.75,57.75 48.12,57.75 45.88,60 45.88,62.88 46.88,63.88
O5  (1 unrouted)
  Top 0.4: U13.4 51.02,30.02 53.75,32.75 53.75,55.62 51,58.38 48.88,58.38 47.88,59.38 47.88,62.88 48.75,63.75 48.75,63.88
O6  (via drill 0.25)  (1 unrouted)
  Top 0.4: v55.25,27.5 57.38,27.5 U14.4
  Bottom 0.4: 48.75,61.77 48.75,55.75 49.75,54.75 49.75,33 v55.25,27.5
O7  (via drill 0.25)
  Top 0.4: U15.4 57.38,32.25 v55.25,32.25 | v49.88,60.75 49.88,62.9 JP2.9
  Bottom 0.4: v49.88,60.75 49.88,55.5 50.38,55 50.38,37.12 v55.25,32.25
O8  (via drill 0.25)
  Top 0.4: U16.4 57.38,37 v55.25,37
  Bottom 0.4: v55.25,37 51,41.25 51,61.73 JP2.10
O9
  Top 0.4: U17.4 56.02,41.73 54.38,43.38 54.38,55.88 51.88,58.38 51.88,62.88 52.85,63.85 JP2.11
O10A
  Top 0.4: U18.8 57.94,46.69 59,47.75 59,64.25 58,65.25 55.5,65.25 54.85,64.61 JP2.13
O10B  (via drill 0.25)
  Top 0.4: U18.7 58.23,49.23 v58.25,49.25
  Bottom 0.4: v58.25,49.25 58.25,60 57.75,60.5 55.5,60.5 54.85,61.15 JP2.14
O11A
  Top 0.4: JP2.15 57.12,63.88 58.25,62.75 58.25,52.75 57,51.5 56.5,51.5 U18.6
O11B
  Top 0.4: JP2.16 56.85,54.94 U18.5
OC0  (via drill 0.25)
  Top 0.8: 48.75,46.5 48.75,41.75 | U10.3 48.77,41.73 48.75,41.75 | U9.3 48.77,46.48 48.75,46.5 | v48.75,54.25 48.75,51.25 | 48.75,51.25 48.75,46.5 | U8.3 48.77,51.23 48.75,51.25 | U12.3 49.27,32.23 48.75,32.75 48.75,37 | 48.75,37 48.75,41.75 | U11.3 48.77,36.98 48.75,37
  Bottom 0.8: JP2.6 46.85,56.15 v48.75,54.25
OC1  (via drill 0.25)
  Top 0.8: U17.3 58.48,44.27 v58.75,44 58.75,39.5 | 58.75,39.5 58.75,34.75 | 58.75,34.75 58.75,31 57.77,30.02 U14.3 55.27,30.02 52.73,27.48 U13.3 | U15.3 58.73,34.77 58.75,34.75 | U16.3 58.73,39.52 58.75,39.5
  Bottom 0.8: JP2.12 52.85,61.4 55,59.25 56,59.25 57,58.25 57,45.75 v58.75,44
OUT0  (via drill 0.25)
  Top 0.2: U21.24 32.7,24.95 32.75,25 v32.75,25.38 | 41.7,51.75 R9.1 40.55,51.8 40.25,51.5 40.25,49 v39.5,48.25
  Bottom 0.2: v32.75,25.38 32.75,25.5 35.5,28.25 35.5,46.25 37.5,48.25 v39.5,48.25
OUT1  (via drill 0.25)
  Top 0.2: 41.7,47 R10.1 41.67,47 v39.5,47 | U21.23 v33.5,25.38
  Bottom 0.2: v33.5,25.38 33.5,25.75 35.88,28.12 35.88,46.12 36.75,47 v39.5,47
OUT2  (via drill 0.25)
  Top 0.2: U21.22 35.12,22.5 v35.12,25.38 | v37.5,42 41.7,42 R11.1
  Bottom 0.2: v35.12,25.38 36.75,27 36.75,41.25 v37.5,42
OUT3  (via drill 0.25)
  Top 0.2: U21.21 36.2,21.7 36.5,22 36.5,24.62 v36.38,24.75 | v37.5,37.25 41.7,37.25 R12.1
  Bottom 0.2: v36.38,24.75 36.38,26.12 37.12,26.88 37.12,36.88 v37.5,37.25
OUT4  (via drill 0.25)
  Top 0.2: 35.33,20.88 U21.20 36.15,20.9 36.88,21.62 v36.88,25.25 | 41.67,32.62 R13.1 41.7,32.5 v37.75,32.5
  Bottom 0.2: v36.88,25.25 36.88,26.12 37.5,26.75 37.5,32.25 v37.75,32.5
OUT5  (via drill 0.25)
  Top 0.2: U21.19 36.1,20.1 37.25,21.25 37.25,24.62 v37.38,24.75 | v41.75,24.75 R14.1
  Bottom 0.2: v37.38,24.75 v41.75,24.75
OUT6  (via drill 0.25)
  Top 0.2: v65.38,20.88 65.38,23 67,24.62 67,29.5 66.75,29.75 65.8,29.75 R15.1 | v25.5,20.75 25.5,21.12 25,21.62 23.77,21.62 U21.35
  Bottom 0.2: v25.5,20.75 65.25,20.75 v65.38,20.88
OUT7  (via drill 0.25)
  Top 0.2: U21.43 26.55,15.3 28.12,16.88 v28.12,19.25 | v66.38,19.62 66.38,23.5 67.38,24.5 67.38,33.88 66.75,34.5 65.8,34.5 R16.1
  Bottom 0.2: v28.12,19.25 28.5,19.62 v66.38,19.62
OUT8  (via drill 0.25)
  Top 0.2: v67.25,20.75 67.25,23.88 67.75,24.38 67.75,38.25 66.75,39.25 65.8,39.25 R3.1 | v25,20.25 25,20.62 24.75,20.88 23.73,20.88 U21.36
  Bottom 0.2: v25,20.25 26.25,20.25 26.38,20.38 65.88,20.38 66.25,20.75 v67.25,20.75
OUT9  (via drill 0.25)
  Top 0.2: R4.1 66.67,43.95 68.12,42.5 68.12,24 v67.88,23.75 | v26.25,23 26.25,24.23 U21.32
  Bottom 0.2: v67.88,23.75 30,23.75 29.25,23 v26.25,23
OUT10  (via drill 0.25)
  Top 0.2: v68.25,20.25 68.25,22.88 68.5,23.12 68.5,42.75 68.12,43.12 R20.1 | U21.40 24.7,17.7 25.5,18.5 v25.5,19.75
  Bottom 0.2: v68.25,20.25 66.25,20.25 66,20 26.5,20 26.25,19.75 v25.5,19.75
OUT11  (via drill 0.25)
  Top 0.2: v30.25,22.75 30.25,24.25 U21.27 | v68.88,22.75 68.88,42.88 69.5,43.5 69.5,48.67 R21.1
  Bottom 0.2: v68.88,22.75 v30.25,22.75
RX1  (via drill 0.25)
  Top 0.2: U20.12 14.38,19.39 14.38,19.12 v14.38,18.25 | v24.88,12.38 25.5,12.38 U21.1
  Bottom 0.2: v14.38,18.25 14.38,14.12 16.12,12.38 v24.88,12.38
RX2  (via drill 0.25)
  Top 0.2: U21.5 28.7,12.3 28.62,12.12 v28.62,10.5 | v21,10.5 21,15.25 18.2,18.05 U20.9
  Bottom 0.2: v28.62,10.5 v21,10.5
SCL2  (via drill 0.25)
  Top 0.2: JP7.2 v9.25,40.12 | v9.25,28.62 JP6.2 | U21.38 23.65,19.25 22.12,19.25 19.12,22.25 v14.5,22.25 R17.1
  Bottom 0.2: v9.25,40.12 v9.25,28.62 9.25,23.38 10.38,22.25 v14.5,22.25
SDA2  (via drill 0.25)
  Top 0.2: JP7.3 v8.75,41.38 | v8.75,29.88 JP6.3 | U21.39 22.25,18.5 19,21.75 v12.25,21.75 R18.1
  Bottom 0.2: v8.75,41.38 v8.75,29.88 8.75,23.25 10.25,21.75 v12.25,21.75
TX1  (via drill 0.25)
  Top 0.2: U20.11 15.65,19.16 15.62,19 v15.62,18.25 | 23.75,14.45 U21.44 v22.5,14.5
  Bottom 0.2: v15.62,18.25 15.62,15.38 16.5,14.5 v22.5,14.5
TX2  (via drill 0.25)
  Top 0.2: v27.88,11.5 27.88,12.5 U21.4 | v20,11.5 20,15 16.93,18.07 U20.10
  Bottom 0.2: v27.88,11.5 v20,11.5
VCC  (via drill 0.25)  (3 unrouted)
  Top 0.6: C7.2 C6.2 30.8,26.8 29.5,25.5 U21.28 | 9.3,22.14 C5.2 9.2,22.45 9.25,22.5 | 37.25,10.57 R6.2 | JP6.1 6.88,27.38 | v7.62,38.88 JP7.1 | 13.55,44.25 C15.2 14.05,44.05 14.25,44.25 | R17.2 R18.2 12.2,25.5 9.25,25.5 | v33.75,10.5 32.45,10.5 C8.2 C9.2 30.3,10.88 U21.7 | 40.45,15.5 C12.1 | 42.5,15.45 U19.3
  Top 0.8: U20.16 9.3,22.14 | JP5.2 37.25,10.57 | 13.55,44.25 11.5,44.25 v8.25,44.25 v7.62,43.62 | v7.62,25.5 9.25,25.5 9.25,22.5 | 14.25,44.25 15.25,44.25 16.8,45.8 R5.2 R2.2 R8.2 R7.2 32.42,45.75 35.5,45.75 | v7.62,27.38 JP6.1 | 38.5,15.5 40.45,15.5 | 38.5,15.5 38.5,12 37.5,11 37,11 | 38.5,15.5 38.5,18.57 C17.2 | 38.75,18.75 38.75,20.75 v38.75,26.12 38.67,26.12 C7.2 | C12.1 42.5,15.45 | R23.2 35.45,45.8 35.5,45.75 | 35.5,45.75 37.83,45.75 R22.2 37.88,45.75 v39.12,45.75
  Bottom 0.6: v7.62,43.62 7.75,43.75
  Bottom 0.8: JP5.2 37.25,10 36.75,10.5 v33.75,10.5 32,8.75 8,8.75 6.25,10.5 6.25,24.12 v7.62,25.5 v7.62,27.38 v7.62,38.88 v7.62,43.62 | 7.75,43.75 v8.25,44.25 | v39.12,45.75 39.12,26.5 v38.75,26.12
VPP
  Top 0.2: JP5.1 35.25,10.68 R6.1 35.25,10.82 35.25,11.75 37,13.5 37,18.5 36.2,19.3 U21.18

## Text on the board
tPlace: MD-CPU04D-v1.1